# EAGLE board Pi3_Analog_hat (EAGLE 7.6.0)
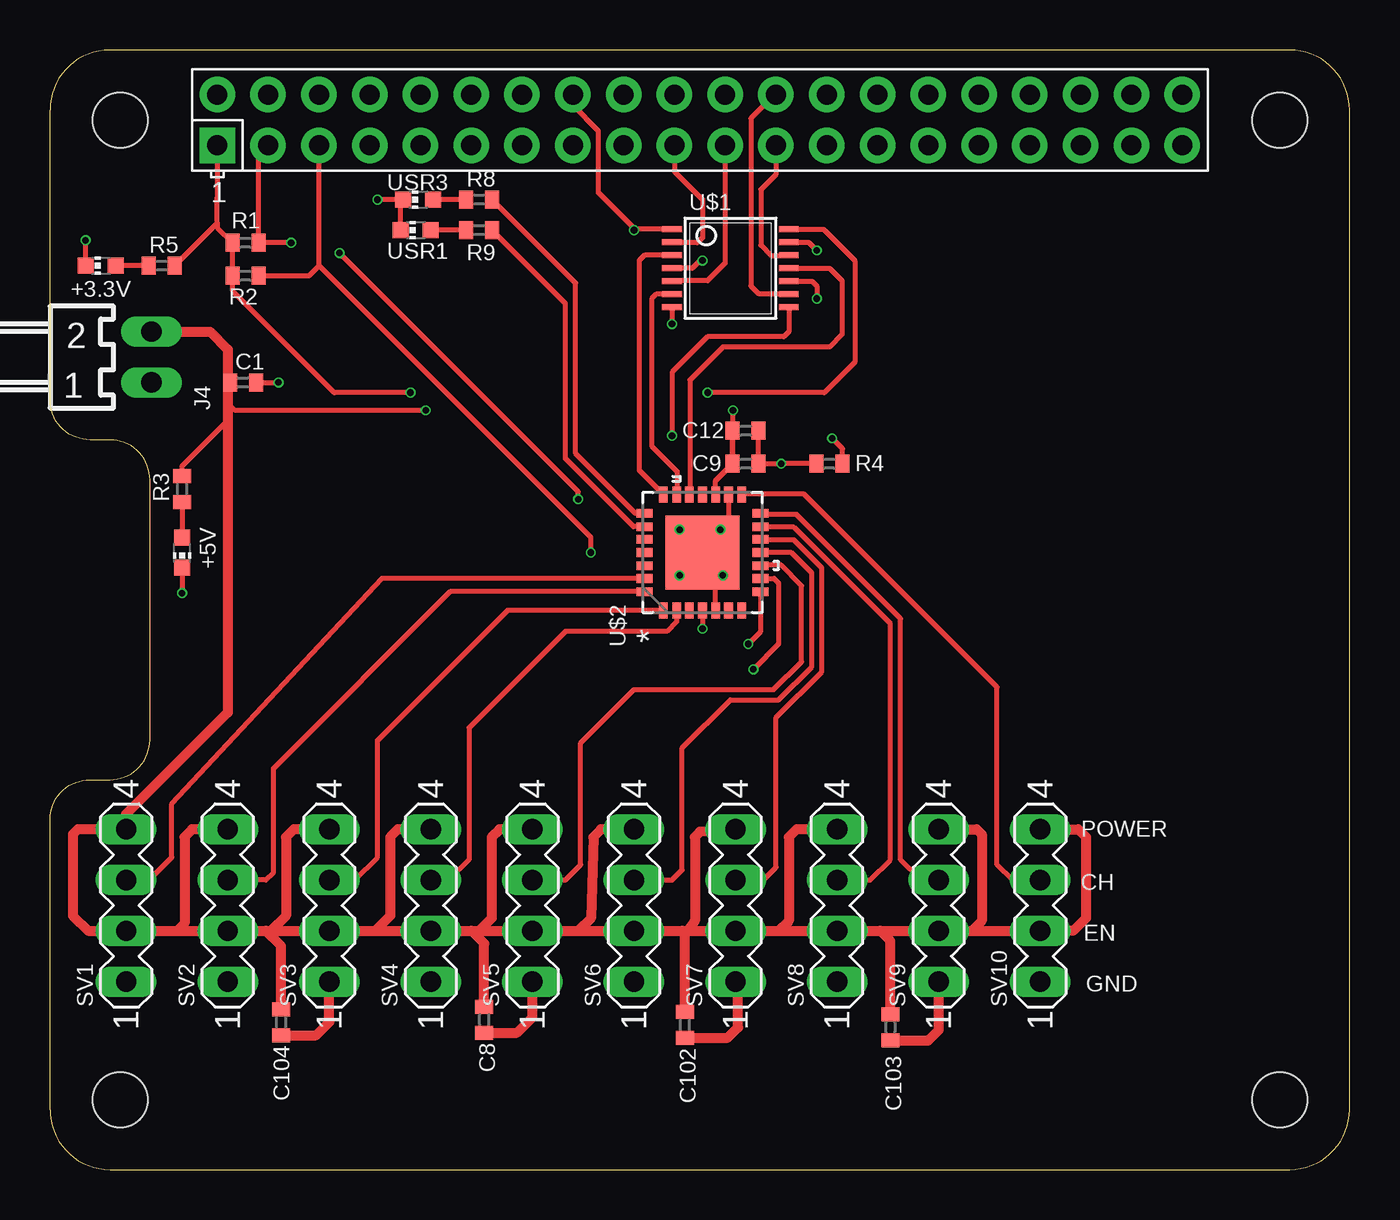
[diagram p0: board, top side]
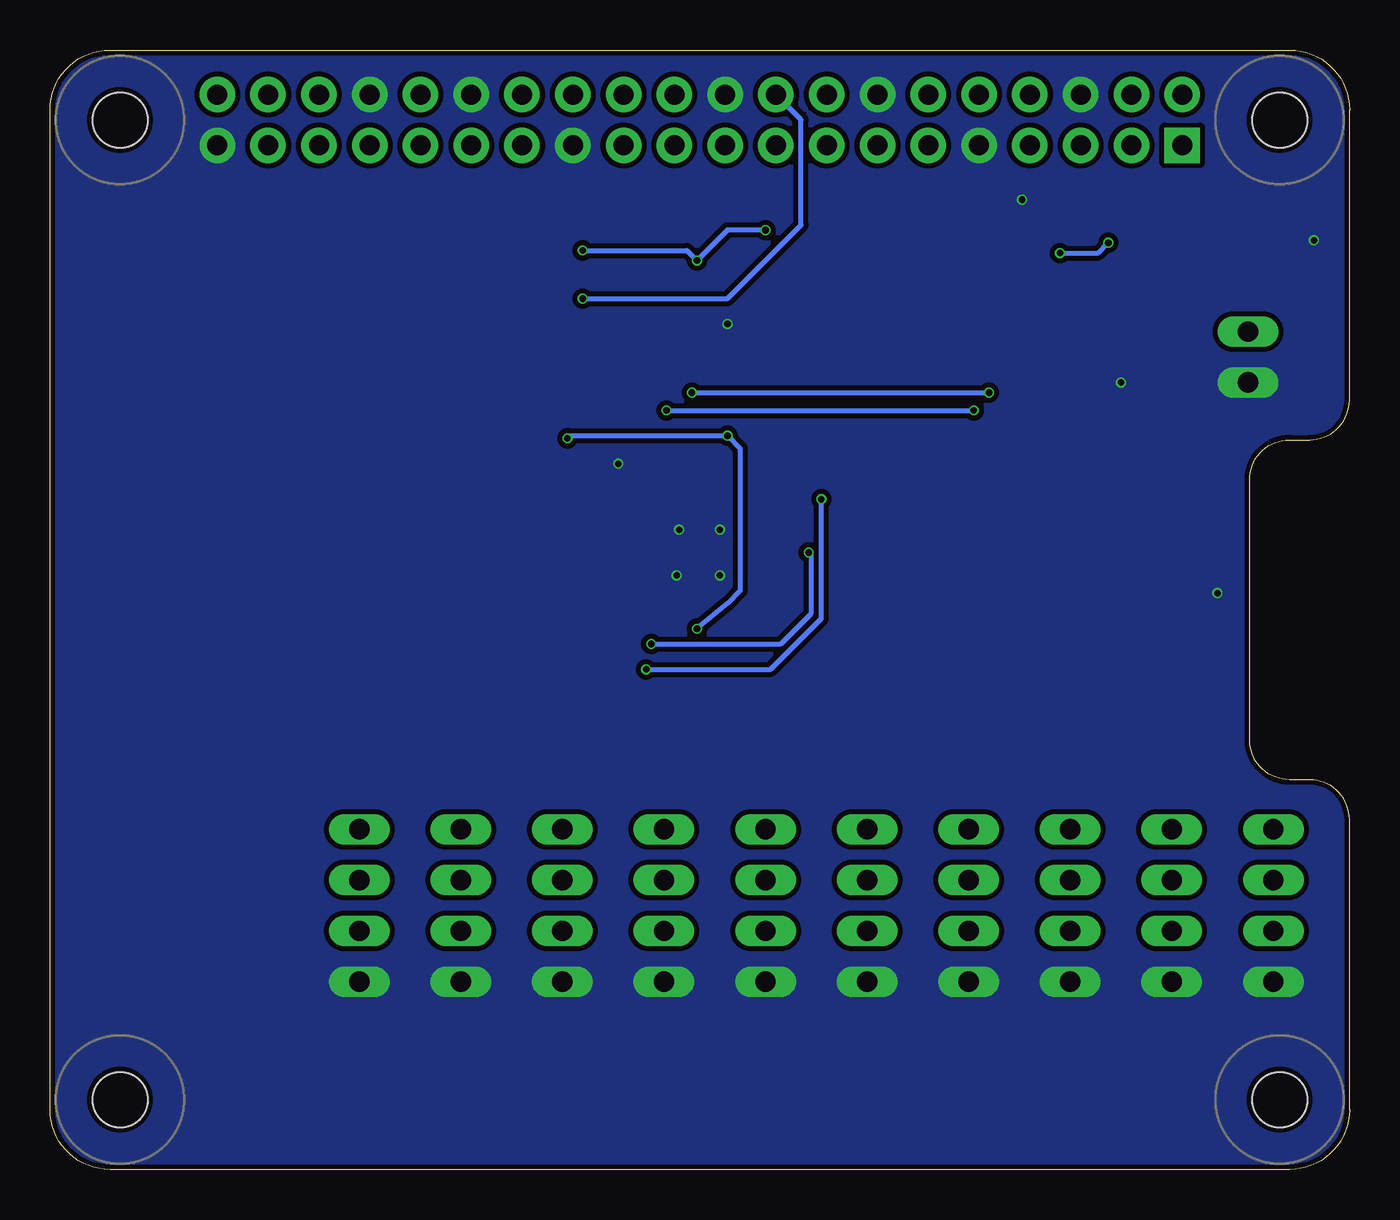
[diagram p1: board, bottom side, seen from below]

Size 65 x 56 mm. Coordinates in mm from the lower left corner, seen from the top.
Copper layers (1*16): Top 0.035mm / dielectric 1.5mm / Bottom 0.035mm
Design rules "EagleRules-2-Layer-Shep": minimum track width 6mil, minimum drill 12mil, track to track 6mil, track to pad 6mil, pad to pad 6mil, via to via 6mil, smd to smd 0mil, copper to edge 10mil, drill to drill 10mil, minimum pad ring 2mil, minimum via ring 2mil, stop-mask expansion 2mil, vias tented up to drill 100mil, thermal gap 10mil

## Footprints (pad centres in the part's own frame; a part is rotated, then mirrored left to right if it is on the bottom)
CHIP-LED0603 = smd 0.8 x 0.8: A 0,-0.75; C 0,0.75
C0402 = smd 0.7 x 0.9: 1 -0.65,0; 2 0.65,0
7395-02 = drill 1.016 long: 1 1.27,0; 2 -1.27,0
R0402 = smd 0.7 x 0.9: 1 -0.65,0; 2 0.65,0
MA04-1 = drill 1.016 long: 1 -3.81,0; 2 -1.27,0; 3 1.27,0; 4 3.81,0
TSSOP-14 = smd 0.305 x 0.991: 1 -1.95,-2.918; 2 -1.3,-2.918; 3 -0.65,-2.918; 4 0,-2.918; 5 0.65,-2.918; 6 1.3,-2.918; 7 1.95,-2.918; 8 1.95,2.918; 9 1.3,2.918; 10 0.65,2.918; 11 0,2.918; 12 -0.65,2.918; 13 -1.3,2.918; 14 -1.95,2.918
QFN65P600X600X100-28N = smd 0.813 x 0.432: 1 -2.896,1.956; 2 -2.896,1.295; 3 -2.896,0.66; 4 -2.896,0; 5 -2.896,-0.66; 6 -2.896,-1.295; 7 -2.896,-1.956; 15 2.896,-1.956; 16 2.896,-1.295; 17 2.896,-0.66; 18 2.896,0; 19 2.896,0.66; 20 2.896,1.295; 21 2.896,1.956 | smd 0.432 x 0.813: 8 -1.956,-2.896; 9 -1.295,-2.896; 10 -0.66,-2.896; 11 0,-2.896; 12 0.66,-2.896; 13 1.295,-2.896; 14 1.956,-2.896; 22 1.956,2.896; 23 1.295,2.896; 24 0.66,2.896; 25 0,2.896; 26 -0.66,2.896; 27 -1.295,2.896; 28 -1.956,2.896 | smd 3.708 x 3.708: 29 0,0
RASPI_BOARD_B+HAT_DF = drill 1 pad 1.778 square: 1 8.37,51.23 | drill 1 pad 1.778: 2 8.37,53.77; 3 10.91,51.23; 4 10.91,53.77; 5 13.45,51.23; 6 13.45,53.77; 7 15.99,51.23; 8 15.99,53.77; 9 18.53,51.23; 10 18.53,53.77; 11 21.07,51.23; 12 21.07,53.77; 13 23.61,51.23; 14 23.61,53.77; 15 26.15,51.23; 16 26.15,53.77; 17 28.69,51.23; 18 28.69,53.77; 19 31.23,51.23; 20 31.23,53.77; 21 33.77,51.23; 22 33.77,53.77; 23 36.31,51.23; 24 36.31,53.77; 25 38.85,51.23; 26 38.85,53.77; 27 41.39,51.23; 28 41.39,53.77; 29 43.93,51.23; 30 43.93,53.77; 31 46.47,51.23; 32 46.47,53.77; 33 49.01,51.23; 34 49.01,53.77; 35 51.55,51.23; 36 51.55,53.77; 37 54.09,51.23; 38 54.09,53.77; 39 56.63,51.23; 40 56.63,53.77 | hole 2.75: 3.5,3.5; 3.5,52.5; 61.5,3.5; 61.5,52.5

## Placement (x,y rotation side)
+3.3V  [CHIP-LED0603]  2.54,45.21 90 top
+5V  [CHIP-LED0603]  6.6,30.86 180 top
C1  5uF  [C0402]  9.65,39.37 0 top
C8  1uF  [C0402]  21.72,7.49 270 top
C9  0.1uF  [C0402]  34.8,35.31 0 top
C12  5uF  [C0402]  34.8,36.96 0 top
C102  5uF  [C0402]  31.75,7.24 270 top
C103  5uF  [C0402]  42.04,7.11 270 top
C104  5uF  [C0402]  11.56,7.37 270 top
J4  22-05-7028-02  [7395-02]  5.08,40.64 270 top
R1  4.7k  [R0402]  9.78,46.35 180 top
R2  4.7k  [R0402]  9.78,44.7 180 top
R3  500  [R0402]  6.6,34.04 90 top
R4  500  [R0402]  38.99,35.31 0 top
R5  500  [R0402]  5.59,45.21 0 top
R8  500  [R0402]  21.46,48.51 0 top
R9  500  [R0402]  21.46,46.99 0 top
SV1  [MA04-1]  3.81,13.21 90 top
SV2  [MA04-1]  8.89,13.21 90 top
SV3  [MA04-1]  13.97,13.21 90 top
SV4  [MA04-1]  19.05,13.21 90 top
SV5  [MA04-1]  24.13,13.21 90 top
SV6  [MA04-1]  29.21,13.21 90 top
SV7  [MA04-1]  34.29,13.21 90 top
SV8  [MA04-1]  39.37,13.21 90 top
SV9  [MA04-1]  44.45,13.21 90 top
SV10  [MA04-1]  49.53,13.21 90 top
U$1  SN74CB3T3125PW  [TSSOP-14]  34.04,45.09 270 top
U$2  PIC16F73-I/ML  [QFN65P600X600X100-28N]  32.64,30.86 90 top
USR1  [CHIP-LED0603]  18.29,46.99 90 top
USR3  [CHIP-LED0603]  18.41,48.51 90 top
X1  RASPI_BOARD_B+#_HD  [RASPI_BOARD_B+HAT_DF]  0,0 0 top

## Library data of the parts
+3.3V +5V USR1 USR3 = led
C1 C8 C9 C12 C102-C104 = rcl
J4 = con-molex; OC_FARNELL: 9731601; OC_NEWARK: unknown
R1-R5 R8 R9 = resistor
SV1-SV10 = con-lstb; OC_FARNELL: unknown; OC_NEWARK: unknown
U$1 = SN74CB3T3125PW
U$2 = Microchip_By_element14_Batch_1; DESCRIPTION: 8-bit CMOS FLASH Microcontrollers; MPN: PIC16F73-I/ML; OC_FARNELL: 1084327; OC_NEWARK: 97K7368; PACKAGE: QFN-28; SUPPLIER: Microchip
X1 = Pi3_Power_hat_Rev1

## Nets
3V3B: X1.17
5V: C1.1 C8.1 C9.1 C12.1 C102.1 C103.1 C104.1 J4.2 R3.2 SV1.2 SV1.4 SV2.2 SV2.4 SV3.2 SV3.4 SV4.2 SV4.4 SV5.2 SV5.4 SV6.2 SV6.4 SV7.2 SV7.4 SV8.2 SV8.4 SV9.2 SV9.4 SV10.2 SV10.4 U$2.17
5V0A: X1.2
5V0B: X1.4
+3V3: R1.2 R2.2 R5.2 U$1.14 X1.1
CE: R4.2 U$1.8 U$2.4
CE_EN: U$1.10 X1.18
CH1: SV10.3 U$2.15
CH2: SV9.3 U$2.14
CH3: SV8.3 U$2.13
CH4: SV7.3 U$2.12
CH5: SV6.3 U$2.11
CH6: SV5.3 U$2.10
CH7: SV4.3 U$2.2
CH8: SV3.3 U$2.1
CH9: SV2.3 U$2.28
CH10: SV1.3 U$2.27
GND: +3.3V.C +5V.C C1.2 C8.2 C9.2 C12.2 C102.2 C103.2 C104.2 J4.1 R4.1 SV1.1 SV2.1 SV3.1 SV4.1 SV5.1 SV6.1 SV7.1 SV8.1 SV9.1 SV10.1 U$1.7 U$2.5 U$2.16 U$2.29 USR1.C USR3.C X1.6 X1.9 X1.14 X1.20 X1.25 X1.30 X1.34 X1.39
ICSPCLK: U$2.24
ICSPDAT: U$2.25
MCLR/VPP_A: U$2.26
MISO: U$1.6 U$2.20
MOSI: U$1.3 U$2.21
N$1: +5V.A R3.1
N$2: U$2.3
N$3: +3.3V.A R5.1
N$9: R8.1 USR3.A
N$10: R9.1 USR1.A
SCL: R2.1 U$2.8 X1.5
SCLK: U$1.11 U$2.19
SDA: R1.1 U$2.9 X1.3
SPI_CE: U$1.9 X1.24
SPI_EN: U$1.1 U$1.4 U$1.13 X1.16
SPI_MISO: U$1.5 X1.21
SPI_MOSI: U$1.2 X1.19
SPI_SCLK: U$1.12 X1.23
USER5: R8.2 U$2.22
USER6: R9.2 U$2.23

## Tracks (layer width: path | path; a pad name or v marks a point on that pad's centre or on a via)
5V  (via drill 0.33)
  Top 0.254: C12.1 C9.1 33.3,34.46 U$2.17 33.3,34.44 34.16,35.31 v34.16,37.97 | v18.8,37.97 9.27,37.97 8.89,38.35 | C1.1 8.89,39.48 8.89,39.5 | R3.2 6.6,35.18 8.89,37.47
  Top 0.508: 6.35,11.94 SV1.2 1.91,11.94 1.14,12.7 1.14,16.76 1.4,17.02 SV1.4 3.81,17.78 8.89,22.86 8.89,37.47 8.89,38.35 8.89,39.5 8.89,41.02 8,41.91 J4.2 | 6.35,11.94 SV2.2 10.79,11.94 | 10.79,11.94 11.05,11.94 | 11.05,11.94 SV3.2 16.26,11.94 | 16.26,11.94 SV4.2 21.08,11.94 | 21.08,11.94 21.46,11.94 | 21.46,11.94 SV5.2 26.42,11.94 | 26.42,11.94 SV6.2 31.62,11.94 | 31.62,11.94 31.88,11.94 | 31.88,11.94 SV7.2 36.45,11.94 | 36.45,11.94 SV8.2 41.53,11.94 | 41.53,11.94 SV9.2 46.1,11.94 | 46.1,11.94 SV10.2 51.18,11.94 51.82,12.57 51.82,16.64 51.44,17.02 SV10.4 | SV2.4 7.11,17.02 6.73,16.64 6.73,12.32 6.35,11.94 | SV3.4 12.19,17.02 11.81,16.64 11.81,12.7 11.05,11.94 | SV4.4 17.4,17.02 17.02,16.64 17.02,12.7 16.26,11.94 | SV5.4 22.48,17.02 22.1,16.64 22.1,12.57 21.46,11.94 | SV6.4 27.56,17.02 27.18,16.64 27.05,12.57 26.42,11.94 | SV7.4 32.51,16.89 32.26,16.64 32.26,12.45 31.88,11.94 | SV8.4 37.34,17.02 36.96,16.64 36.96,12.45 36.45,11.94 | SV9.4 46.35,17.02 46.61,16.76 46.61,12.45 46.1,11.94 | C104.1 11.56,11.18 10.79,11.94 | C8.1 21.72,11.3 21.08,11.94 | C102.1 31.75,11.81 31.62,11.94 | C103.1 42.04,11.43 41.53,11.94
  Bottom 0.254: v34.16,37.97 v18.8,37.97
+3V3  (via drill 0.33)
  Top 0.254: X1.1 8.37,48.64 8.37,47.34 | 8.37,47.34 8.37,47.11 R1.2 R2.2 9.14,44.69 9.14,43.94 14.22,38.86 v18.03,38.86 | U$1.14 38.69,47.03 40.26,45.47 40.26,40.39 38.73,38.86 v32.89,38.86 | R5.2 8.37,47.34
  Bottom 0.254: v32.89,38.86 v18.03,38.86
CE  (via drill 0.33)
  Top 0.254: U$1.8 36.95,41.91 36.7,41.66 32.89,41.66 31.11,39.88 v31.11,36.7 | U$2.4 v32.64,27.05 | R4.2 39.64,36.05 v39.12,36.58
  Bottom 0.254: v32.64,27.05 31.11,28.32 30.48,28.96 30.48,36.07 v31.11,36.7 38.99,36.7 v39.12,36.58
CE_EN  (via drill 0.33)
  Top 0.254: U$1.10 38.12,44.44 38.35,44.2 v38.35,43.56
  Bottom 0.254: v38.35,43.56 31.11,43.56 27.43,47.24 27.43,52.51 X1.18
CH1
  Top 0.254: SV10.3 48.13,14.48 47.37,15.24 47.37,24.13 37.72,33.78 34.62,33.78 U$2.15
CH2
  Top 0.254: SV9.3 43.56,14.48 42.55,15.49 42.55,27.56 37.34,32.77 35.59,32.77 U$2.14
CH3
  Top 0.254: SV8.3 41.02,14.48 42.04,15.49 42.04,27.3 37.21,32.13 35.56,32.13 U$2.13
CH4
  Top 0.254: SV7.3 35.69,14.48 36.32,15.11 36.32,22.61 38.61,24.89 38.61,30.1 37.21,31.5 35.56,31.5 U$2.12
CH5
  Top 0.254: SV6.3 31.11,14.48 31.62,14.99 31.62,21.08 34.04,23.5 36.45,23.5 38.1,25.15 38.1,29.84 37.08,30.86 U$2.11
CH6
  Top 0.254: SV5.3 25.78,14.48 26.54,15.24 26.54,21.34 29.21,24 36.2,24 37.59,25.4 37.59,29.21 36.58,30.23 35.56,30.23 U$2.10
CH7
  Top 0.254: U$2.2 31.34,27.41 30.86,26.92 25.78,26.92 20.95,22.1 20.95,15.49 19.94,14.48 SV4.3
CH8
  Top 0.254: U$2.1 22.89,27.96 16.38,21.46 16.38,15.62 15.24,14.48 SV3.3
CH9
  Top 0.254: U$2.28 20.02,28.91 11.18,20.07 11.18,14.86 10.79,14.48 SV2.3
CH10
  Top 0.254: U$2.27 16.61,29.57 6.1,18.29 6.1,15.62 4.95,14.48 SV1.3
GND  (via drill 0.33)
  Top 0.254: U$2.16 33.93,32.41 v33.53,32 | U$2.5 33.3,29.36 v33.66,29.72 | v16.38,48.51 USR3.C 17.54,48.39 USR1.C | C12.2 C9.2 v36.58,35.31 R4.1 | C1.2 v11.43,39.37 | +5V.C v6.6,28.83 | U$1.7 v31.12,42.29 v31.11,42.29 | +3.3V.C 1.78,45.22 v1.78,46.48
  Top 0.508: U$2.29 32.64,31.11 v33.53,32 | C8.2 23.35,6.84 24.13,7.62 SV5.1 | C102.2 33.89,6.59 34.42,7.11 34.42,9.27 SV7.1 | C103.2 43.93,6.46 44.45,6.99 SV9.1 | C104.2 13.32,6.72 13.97,7.37 SV3.1
  other vias: 31.5,29.72 31.5,32
  pour Bottom (isolate 0.254, no thermals): 0.13,-0.13 66.93,-0.13 66.93,56.64 0.13,56.64
MISO
  Top 0.254: U$1.6 30.32,43.78 30.1,43.56 30.1,36.2 31.37,34.92 31.37,33.78 U$2.20
MOSI
  Top 0.254: U$1.3 29.73,45.73 29.46,45.47 29.46,34.98 U$2.21
N$1
  Top 0.254: R3.1 +5V.A
N$3
  Top 0.254: R5.1 +3.3V.A
N$9
  Top 0.254: R8.1 USR3.A
N$10
  Top 0.254: R9.1 USR1.A
SCL  (via drill 0.33)
  Top 0.254: R2.1 12.95,44.7 13.46,45.21 | 13.46,45.21 13.46,51.22 X1.5 | U$2.8 35.53,26.9 v34.92,26.29 | v27.05,30.86 27.05,31.62 13.46,45.21
  Bottom 0.254: v34.92,26.29 28.45,26.29 26.92,27.81 26.92,30.73 v27.05,30.86
SCLK
  Top 0.254: U$1.11 38.99,45.09 39.62,44.45 39.62,41.78 38.99,41.15 33.66,41.15 32,39.5 32,33.78 U$2.19
SDA  (via drill 0.33)
  Top 0.254: X1.3 10.43,50.75 R1.1 v12.06,46.35 | U$2.9 36.22,29.57 36.45,29.34 36.45,26.29 v35.18,25.02 | v26.42,33.53 26.42,33.91 v14.48,45.85
  Bottom 0.254: v35.18,25.02 28.96,25.02 26.42,27.56 v26.42,33.53 | v14.48,45.85 12.57,45.85 v12.06,46.35
SPI_CE
  Top 0.254: X1.24 36.24,53.77 35.05,52.58 35.05,44.2 35.43,43.81 36.92,43.81 U$1.9
SPI_EN  (via drill 0.33)
  Top 0.254: U$1.1 29.25,47.03 | 29.25,47.03 v29.21,46.99 | v32.64,45.47 32.51,45.47 32.13,45.09 U$1.4 | U$1.13 37.94,46.38 v38.35,45.97 | 29.25,47.03 27.43,48.86 27.43,51.94 26.15,53.23 X1.16
  Bottom 0.254: v29.21,46.99 31.11,46.99 v32.64,45.47 33.15,45.97 v38.35,45.97
SPI_MISO
  Top 0.254: X1.21 33.77,45.33 32.89,44.45 31.13,44.45 U$1.5
SPI_MOSI
  Top 0.254: X1.19 31.23,49.92 32.64,48.51 32.64,46.61 32.38,46.35 31.15,46.35 U$1.2
SPI_SCLK
  Top 0.254: X1.23 36.31,49.77 35.56,49.02 35.56,46.23 36.07,45.72 U$1.12
USER5
  Top 0.254: U$2.22 29.29,32.82 26.29,35.81 26.29,44.34 R8.2
USER6
  Top 0.254: U$2.23 29.18,32.16 25.78,35.56 25.78,43.32 R9.2

## Text on the board
tPlace: POWER | CH | EN | GND